# Altium PCB Second_plate_STM32.PcbDoc
Units mm, origin at the board's own origin, x right, y up, seen from the top; angles counter-clockwise.
Board outline 73.75 x 29.75 mm, 2 copper layers (Top Layer, Bottom Layer); 24 components, 27 nets, 149 pads, 57 vias.
Unrouted connection lines stored in the file: 1.
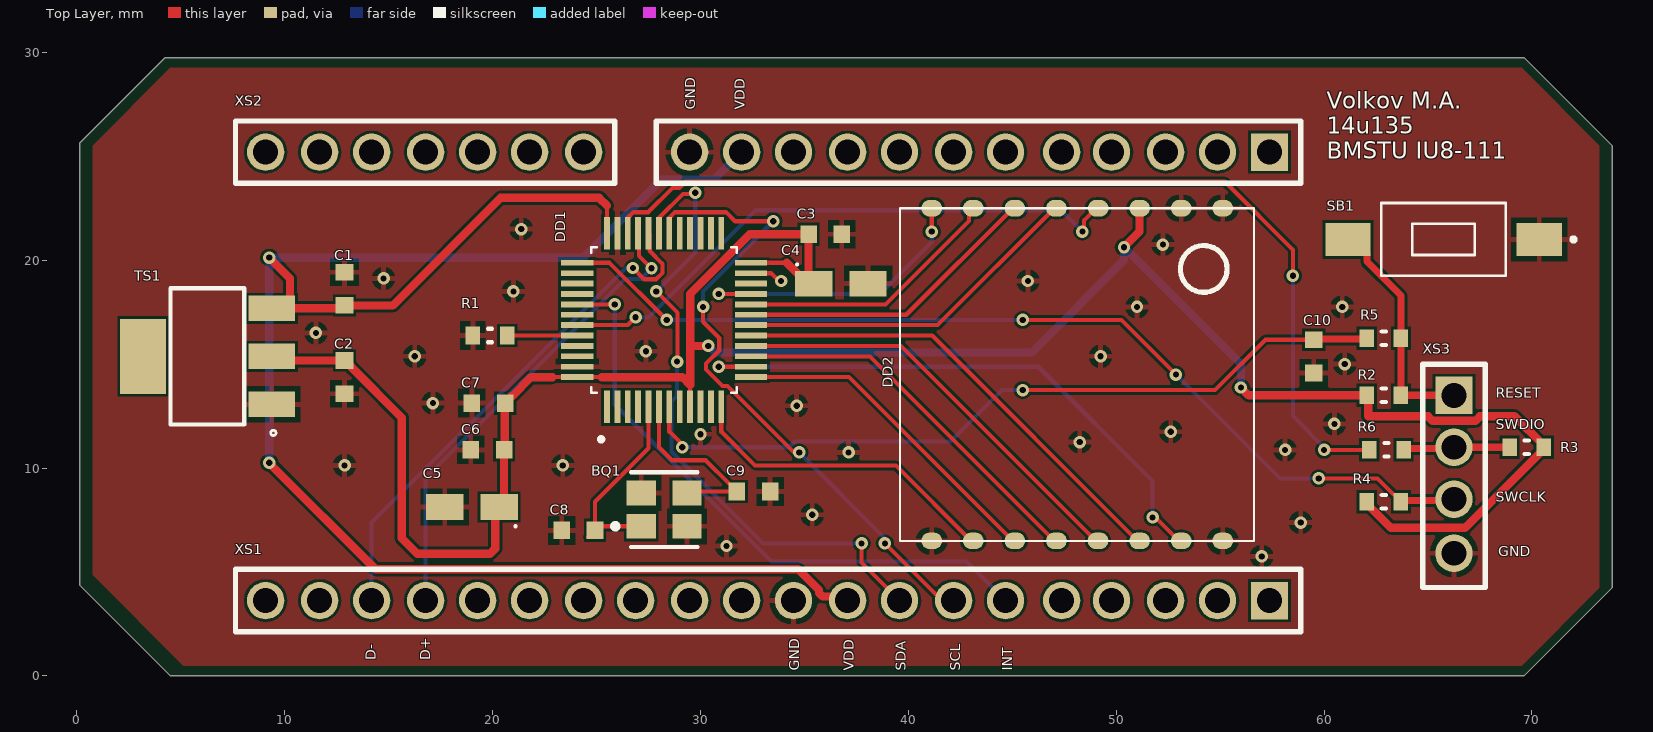
[diagram p0: Top Layer view]
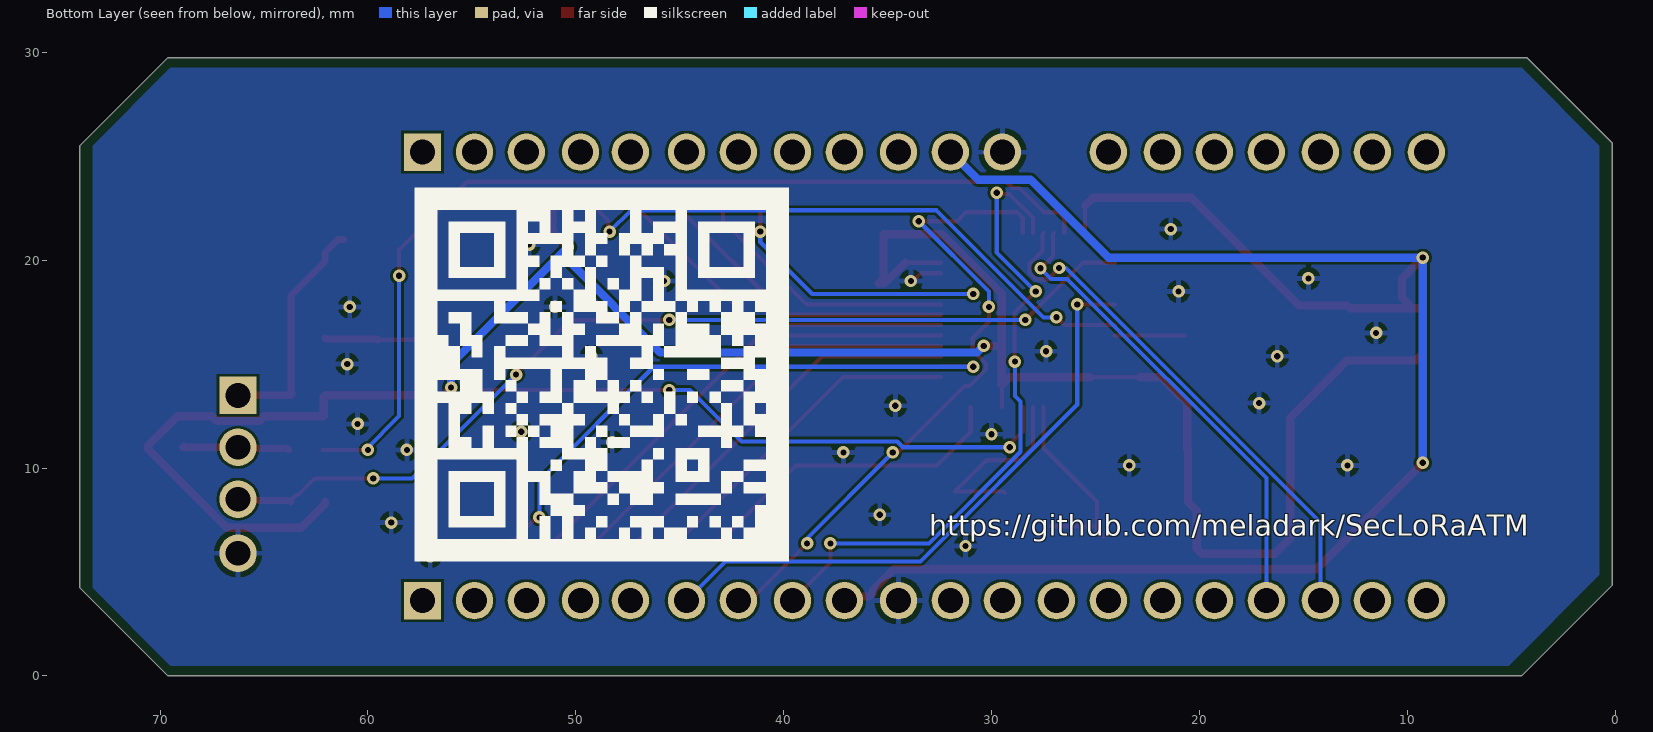
[diagram p1: Bottom Layer view, seen from below]

## Layer stack, top to bottom
Top Solder: solder mask 0.0102, Solder Resist, Dk 3.5
Top Layer: signal copper 0.0356
Dielectric 1: dielectric 0.32, FR-4, Dk 4.8
Bottom Layer: signal copper 0.0356
Bottom Solder: solder mask 0.0102, Solder Resist, Dk 3.5

## Board outline
0.125,4.375 0.125,25.625 4.25,29.75 69.625,29.75 73.875,25.5 73.875,4.25 69.625,0 4.5,0

## Design rules (kind name [scope] priority, off if disabled: settings)
Clearance [All] p1: gap=0.125 ignorepadtopadclearanceinfootprint=FALSE except(0.2: Arc-Hole Track-Hole SMDPad-Hole THPad-Hole Via-Hole Fill-Hole Poly-Hole Region-Hole Text-Hole)
PolygonConnect [All] p1: connectstyle=Relief reliefconductorwidth=0.254 reliefentries=4 polygonreliefangle="90 Angle" airgapwidth=0.254
RoutingVias [All] p1: holewidth=0.3 width=0.6 viastyle="Through Hole" minholewidth=0.3 minwidth=0.6 maxholewidth=0.4 maxwidth=0.8
SolderMaskExpansion [All] p1: expansion=0.102
Width [All] p1: maxlimit=0.6 minlimit=0.125 preferedwidth=0.25
30 further rules are at their usual default settings.

## Components (designator, comment, footprint, x,y, rotation, side; value= is the part's Value field where it differs from the comment)
BQ1 "NX3225GA" NDK_NX3225GA_0 28.25,8 r0 top
C1 "*" CAPC1608X09L 12.875,18.625 r90 top
C2 "*" CAPC1608X09L 12.875,14.375 r90 top
C3 "*" CAPC1608X09L 36,21.25 r0 top
C4 "*" CAPMP3216X16N-A 36.75,18.875 r0 top
C5 "*" CAPMP3216X16N-A 19,8.125 r180 top
C6 "GRM188R72A104KA35D" CAPC1608X09L 19.75,10.875 r180 top
C7 "*" CAPC1608X09L 19.8,13.125 r180 top
C8 "*" CAPC1608X09L 24.125,7 r0 top
C9 "*" CAPC1608X09L 32.55,8.875 r180 top
C10 "*" CAPC1608X09L 59.5,15.375 r270 top
DD1 "STM32L073CZT6" *QFP50P900X900X160-48N 28.25,17.125 r90 top
DD2 "RA-02 SX1278" RA-02 56.625,22.5 r270 top
R1 "R1608" RESC1608X05N 19.875,16.375 r0 top value=22
R2 "R1608" RESC1608X05N 62.875,13.5 r0 top value=10k
R3 "R1608" RESC1608X05N 69.75,11 r180 top value=10k
R4 "R1608" RESC1608X05N 62.875,8.375 r0 top value=10k
R5 "R1608" RESC1608X05N 62.875,16.25 r0 top value=22
R6 "R1608" RESC1608X05N 63,10.875 r0 top value=22
SB1 "1437566-3 (FSMSM)" *SW_1437566-4 65.75,21 r180 top
TS1 "LD1117S33CTR" *SOT223 6.276,15.375 r180 top
XS1 "PBS-20" PBS-20 57.375,3.625 r180 top
XS2 "PBS-20" "PBS-20 - 13" 57.375,25.199 r180 top
XS3 "PBS-4" PBS-4 66.25,13.5 r270 top

## Footprints (in the part's own frame and the unit in brackets; to place one, negate y for a bottom-side part, rotate by r counter-clockwise, add the part's x,y. Pads: shape width x height; smd on the part's side, far side on the other; paste and mask are expansions set on the pad)
*QFP50P900X900X160-48N [mm]
  rect 1.56x0.28 smd: 1(-4.18,2.75) 2(-4.18,2.25) 3(-4.18,1.75) 4(-4.18,1.25) 5(-4.18,0.75) 6(-4.18,0.25) 7(-4.18,-0.25) 8(-4.18,-0.75) 9(-4.18,-1.25) 10(-4.18,-1.75) 11(-4.18,-2.25) 12(-4.18,-2.75) 25(4.18,-2.75) 26(4.18,-2.25) 27(4.18,-1.75) 28(4.18,-1.25) 29(4.18,-0.75) 30(4.18,-0.25) 31(4.18,0.25) 32(4.18,0.75) 33(4.18,1.25) 34(4.18,1.75) 35(4.18,2.25) 36(4.18,2.75)
  rect 0.28x1.56 smd: 13(-2.75,-4.18) 14(-2.25,-4.18) 15(-1.75,-4.18) 16(-1.25,-4.18) 17(-0.75,-4.18) 18(-0.25,-4.18) 19(0.25,-4.18) 20(0.75,-4.18) 21(1.25,-4.18) 22(1.75,-4.18) 23(2.25,-4.18) 24(2.75,-4.18) 37(2.75,4.18) 38(2.25,4.18) 39(1.75,4.18) 40(1.25,4.18) 41(0.75,4.18) 42(0.25,4.18) 43(-0.25,4.18) 44(-0.75,4.18) 45(-1.25,4.18) 46(-1.75,4.18) 47(-2.25,4.18) 48(-2.75,4.18)
  silkscreen extent -5.84,-3.5 3.5,3.5, body extent -4.5,-4.5 4.5,4.5, height 1.6
*SOT223 [mil]
  rect 88x48 smd: 1(-122,91) 2(-122,0) 3(-122,-91)
  rect 86.61x141.73 smd: 4(122.01,0)
  silkscreen extent -130,-129 70,150, body extent -138,-128 138,128, height 67
*SW_1437566-4 [mm]
  rect 2.18x1.6 smd: 1(-4.6,0) 2(4.6,0)
  silkscreen extent -6.35,-1.75 3,1.75, body extent -4.98,-1.75 4.98,1.75, height 4.4
CAPC1608X09L [mm] "Chip Capacitor, 2-Leads, Body 1.60x0.80mm, IPC High Density"
  rect 0.8x0.85 smd paste-0.05 mask+0.07: 1(-0.8,0) 2(0.8,0)
  body extent -0.8,-0.4 0.8,0.4, height 0.9
CAPMP3216X16N-A [mm] "Molded Capacitor, 2-Leads, Body 3.20x1.60mm, IPC Medium Density"
  rect 1.8x1.23 smd: 1(-1.31,0) 2(1.31,0)
  silkscreen extent -2.15,0.88 -2.05,0.97, body extent -1.92,-0.9 1.92,0.9, height 1.6
NDK_NX3225GA_0 [mm]
  rect 1.4x1.2 smd paste+0 mask+0: 1(-1.1,-0.8) 2(1.1,-0.8) 3(1.1,0.8) 4(-1.1,0.8)
  silkscreen extent -2.47,-1.8 1.6,1.8, body extent -1.6,-1.25 1.6,1.25, height 0.6
PBS-4 [mm]
  rect 1.8x1.8 hole 1.2: 1(0,0)
  round 1.8 hole 1.2: 2(2.5,0) 3(5,0) 4(7.6,0)
  silkscreen extent -1.5,-1.5 9.25,1.5, body extent -1.25,-1.27 8.91,1.27, height 8.6
PBS-20 [mm]
  rect 1.8x1.8 hole 1.2: 1(0,0)
  round 1.8 hole 1.2: 2(2.5,0) 3(5,0) 4(7.6,0) 5(10,0) 6(12.7,0) 7(15.2,0) 8(17.8,0) 9(20.3,0) 10(22.9,0) 11(25.4,0) 12(27.9,0) 13(30.5,0) 14(33,0) 15(35.6,0) 16(38.1,0) 17(40.6,0) 18(43.2,0) 19(45.7,0) 20(48.3,0)
  silkscreen extent -1.5,-1.5 49.75,1.5, body extent -1.27,-1.27 49.53,1.27, height 8.4
"PBS-20 - 13" [mm]
  rect 1.8x1.8 hole 1.2: 1(0,0)
  round 1.8 hole 1.2: 2(2.5,0) 3(5,0) 4(7.6,0) 5(10,0) 6(12.7,0) 7(15.2,0) 8(17.8,0) 9(20.3,0) 10(22.9,0) 11(25.4,0) 12(27.9,0) 14(33,0) 15(35.6,0) 16(38.1,0) 17(40.6,0) 18(43.2,0) 19(45.7,0) 20(48.3,0)
  silkscreen extent -1.5,-1.5 49.75,1.5, body extent -1.27,-1.27 49.53,1.27, height 8.4
RA-02 [mm]
  oval 0.8x1 smd: 1(0,-1.5) 2(0,-3.5) 3(0,-5.5) 4(0,-7.493) 5(0,-9.5) 6(0,-11.5) 7(0,-13.5) 8(0,-15.5) 9(16,-15.5) 10(16,-13.5) 11(16,-11.5) 12(16,-9.5) 13(16,-7.5) 14(16,-5.5) 15(16,-3.5) 16(16,-1.5)
  silkscreen extent 0,-17.02 16,0, body extent 0,-17.01 16,-0.01, height 3.2
RESC1608X05N [mm] "Chip Resistor, 2-Leads, Body 1.60x0.80mm, IPC Medium Density"
  rect 0.7x0.85 smd paste-0.05: 1(-0.825,0) 2(0.825,0)
  silkscreen extent -0.1,-0.33 0.1,0.33, body extent -0.8,-0.4 0.8,0.4, height 0.45

## Part data
BQ1: library part NX3225GA-25MHZ, "NX3225GA-25MHZ 8pF, 25 МГц, 30/20ppm, 8пФ, -40...+85°C, SMD 3.2*2.5*0.75мм, Кварцевый резонатор", Package="SMD-4 NDK America, Inc.", Availability=Unavailable, ComponentLink1Description=buy, ComponentLink1URL=https://www.chipdip.ru/product0/9000523947, ComponentLink2Description=datasheet, ComponentLink2URL=https://static.chipdip.ru/lib/014/DOC004014815.pdf, MF="NDK America, Inc.", MP="NX3225GA-25MHZ 8pF", Price=None, SnapEDA_Link=https://www.snapeda.com/parts/NX2520SA-24.000000MHZ-B8/NDK%20America%2C%20Inc./view-part/?ref=snap
C1 C2 C3 C6 C7 C8 C9 C10: library part CC1608, "Конденсатор 1.6x0.8 мм", Tolerance=±10%, РКД Наименование="CC1608M - NP0 - 16 V - 10 nF ±10%", ТКЕ=X7R
  C1: GRM21BR71C105KA01L=100n
  C2: GRM21BR71C105KA01L=10u
  C3 C6 C7 C10: GRM188R71H104K=100nF
  C8: GRM1885C1H240J=24pF
  C9: GRM1887U1H472JA01D=24pF
C4 C5: library part CT3216-A, "Tantalum Surface Mount Capacitor, Size A", Voltage=6.3V
  C4: TECAP1/16VA10=1uF
  C5: TECAP10/10VA10=10uF
DD1: "ARM® Cortex®-M0+ STM32 L0 Microcontroller IC 32-Bit 32MHz 192KB _192K x 8_ FLASH 48-LQFP", Package="LQFP-48 STMicroelectronics", Digi-Key_Part_Number=497-17506-ND, Digi-Key_Purchase_URL=https://www.digikey.com/product-detail/en/stmicroelectronics/STM32L073CZT6/497-17506-ND/8024098?utm_source=snapeda&utm_medium=aggregator&utm_campaign=symbol, MF=STMicroelectronics, MP=STM32L073CZT6, SnapEDA_Link=https://www.snapeda.com/parts/STM32L073CZT6/STMicroelectronics/view-part/?ref=snap
DD2: library part RA-02
R1 R2 R3 R4 R5 R6: "Резистор 1.6x0.8 мм", Tolerance=±1%, РКД Наименование="RC1608M - 22 Ohm ±1%"
SB1: library part FSMSM, "1437566-3 (FSMSM), Кнопка тактовая h=4.6 мм SMD SPST Switch Tactile / Switch Tactile OFF (ON) SPST Rectangular Button Gull Wing 0.05A 24VDC SMD Loose", ComponentLink1Description=buy, ComponentLink1URL=https://www.chipdip.ru/product/tyco-1437566-3-fsmsm, ComponentLink2Description=datasheet, ComponentLink2URL=https://static.chipdip.ru/lib/071/DOC000071159.pdf, Артикул="1437566-3 (FSMSM)", Произвдитель="TE Connectivity"
TS1: "Linear Regulator / LDO Regulator Pos 3.3V 1.3A 4-Pin(3+Tab) SOT-223 T/R", Code_IPC=SOT-223, ComponentLink1Description=buy, ComponentLink1URL=https://www.chipdip.ru/product/ld1117s33ctr-2, ComponentLink2Description=datasheet, ComponentLink2URL=https://static.chipdip.ru/lib/292/DOC000292513.pdf, DatasheetVersion="revB, Feb-2007", PackageDescription="3-Lead Plastic Small Outline Transistor (TT) [SOT-23]", PackageReference=SOT-223, PackageVersion="revBB, Aug-2009", PartNumber=LD1117S33CTR
XS1: library part PBS_20_2
XS2: library part PBS-20_1, ComponentLink1Description=datasheet, ComponentLink1URL=https://static.chipdip.ru/lib/226/DOC000226931.pdf, ComponentLink2Description=buy, ComponentLink2URL=https://www.chipdip.ru/catalog-show/pin-connectors-and-sockets?x.698=ZGQ&gq=PBS
XS3: library part "отладка swd", "2.54mm swdio", ComponentLink1Description=3d, ComponentLink1URL=https://www.3dcontentcentral.com/secure/download-model.aspx?catalogid=171&id=455493, ComponentLink2Description=https://www.chipdip.ru/product/pld-6, ComponentLink2URL=https://www.chipdip.ru/product/pld-6

## Via types
v1: diameter 0.6, hole 0.3, Top Layer to Bottom Layer, 57 vias

## Nets (pads, with @x,y where several pads share a name; then routed paths per layer and width w, separated by ;. In a path a pad name is that pad's centre, name@x,y a point inside that pad or via, vN(x,y) a via of type N, cw(c..) or ccw(c..) an arc to the next point about the centre after c; other vN are vias at no path point)
BOOT0: DD1.44 R1.2 | length 3.4
  Top Layer w0.2: R1.2 DD1.44
DM: DD1.32 XS1.18 | length 25.4
  Top Layer w0.2: v1(26.75,19.625) 27.291,19.084 27.86,19.084 28.167,19.391 28.167,19.826 27.54,20.453 27.54,21.265 DD1.32
  Bottom Layer w0.2: XS1.18 14.175,7.377 26.423,19.625 v1(26.75,19.625)
DP: DD1.33 XS1.17 | length 22.9
  Top Layer w0.2: DD1.33 27.04,21.265 27.04,20.211 v1(27.642,19.609)
  Bottom Layer w0.2: XS1.17 16.775,9.517 26.358,19.1 27.133,19.1 v1(27.642,19.609)
GND: BQ1.2 BQ1.4 C1.2 C2.1 C3.2 C4.2 C5.2 C6.2 C7.2 C8.1 C9.1 C10.2 DD1.8 DD1.23 DD1.35 DD1.47 DD2.1 DD2.2 DD2.9 DD2.16 R1.1 SB1.1 TS1.1 XS1.10 XS2.12 XS3.4 | length 1.6
  Top Layer w0.2: DD1.23 33.392,19.375 33.767,19 v1(33.875,19)
  other v1: 57,5.75 31.25,6.25 58.875,7.375 35.375,7.75 12.875,10.125 23.375,10.125 37.125,10.75 58.125,10.875 48.25,11.25 30,11.625 52.625,11.75 60.5,12.125 34.625,13 17.125,13.125 61,15 16.25,15.375 49.25,15.375 27.375,15.625 11.5,16.5 51,17.75 60.875,17.75 21,18.5 45.75,19 14.75,19.125 52.25,20.75 21.375,21.5
INT: DD1.41 XS1.6 | length 29.3
  Top Layer w0.2: DD1.41 v1(25.875,17.875)
  Bottom Layer w0.2: v1(25.875,17.875) 25.875,13.048 33.423,5.5 42.8,5.5 XS1.6
MISO: DD1.16 DD2.13 | length 20.6
  Top Layer w0.2: DD1.16 39.65,15.875 49.025,6.5 DD2.13
MOSI: DD1.17 DD2.14 | length 22.8
  Top Layer w0.2: DD1.17 41.15,16.375 51.025,6.5 DD2.14
NetBQ1_1: BQ1.1 C8.2 DD1.5 | length 9.5
  Top Layer w0.2: C8.2@24.6,6.675 24.625,6.675 24.925,6.975 C8.2 24.925,8.377 27.5,10.952 DD1.5 ; C8.2@25.125,7.2 BQ1.1
NetBQ1_3: BQ1.3 C9.2 DD1.6 | length 9
  Top Layer w0.2: DD1.6 28,11 28.625,10.375 30.25,10.375 31.425,9.2 31.45,9.2 31.75,8.9 C9.2 29.425,8.875 BQ1.3
NetC10_1: C10.1 DD1.7 R5.1 | length 37.3
  Top Layer w0.2: DD1.7 28.5,11.75 29.125,11.125 v1(29.125,11) ; v1(45.5,13.75) 54.75,13.75 57.175,16.175 C10.1
  Top Layer w0.35: C10.1 59.537,16.212 62.012,16.212 R5.1
  Bottom Layer w0.2: v1(29.125,11) 34.258,11 34.533,11.275 42.025,11.275 44.5,13.75 v1(45.5,13.75)
NetDD1_18: DD1.18 DD2.5 | length 17
  Top Layer w0.2: DD1.18 41.4,16.875 47.025,22.5 DD2.5
NetDD1_19: DD1.19 DD2.6 | length 14.8
  Top Layer w0.2: DD1.19 39.9,17.375 45.025,22.5 DD2.6
NetDD1_20: DD1.20 DD2.7 | length 12.8
  Top Layer w0.2: DD1.20 38.893,17.875 42.91,21.892 42.91,22.285 DD2.7
NetDD1_21: DD1.21 DD2.8 | length 14.5
  Top Layer w0.2: v1(30.875,18.375) DD1.21 ; v1(41.125,21.375) DD2.8
  Bottom Layer w0.2: v1(30.875,18.375) 38.625,18.375 41.125,20.875 v1(41.125,21.375)
NetDD1_34: DD1.34 R6.1 | length 47.3
  Top Layer w0.2: DD1.34 26.5,22.043 26.767,22.31 27.484,22.31 28.654,23.48 28.977,23.48 29.272,23.775 55.225,23.775 58.5,20.5 v1(58.5,19.25) ; v1(60,10.875) R6.1
  Bottom Layer w0.2: v1(58.5,19.25) 58.5,12.5 v1@60.125,10.875
NetDD1_43: DD1.43 DD2.4 | length 28.5
  Top Layer w0.2: DD1.43 26.5,16.875 v1(26.875,17.25) ; v1(48.375,21.375) 48.452,21.452 48.452,21.92 49.032,22.5 DD2.4
  Bottom Layer w0.2: v1(26.875,17.25) 27.5,17.25 32.65,22.4 47.35,22.4 v1(48.375,21.375)
NSS: DD1.14 DD2.15 | length 28.3
  Top Layer w0.2: v1(30.875,14.875) DD1.14 ; v1(51.75,7.625) 51.9,7.625 53.025,6.5 DD2.15
  Bottom Layer w0.2: v1(30.875,14.875) 46.25,14.875 51.75,9.375 v1(51.75,7.625)
PA2: DD1.12 DD2.10 | length 15.5
  Top Layer w0.2: DD1.12 31,11.75 32.625,10.125 39.4,10.125 43.025,6.5 DD2.10
PA3: DD1.13 DD2.11 | length 16
  Top Layer w0.2: DD1.13 37.15,14.375 45.025,6.5 DD2.11
RESET: R2.2 R5.2 SB1.2 XS3.1 | length 11.3
  Top Layer w0.35: SB1.2 61.44,21 62.065,20.375 62.065,19.935 63.7,18.3 R5.2 63.7,13.625 63.637,13.563 R2.2 XS3.1
SCK: DD1.15 DD2.12 | length 18.4
  Top Layer w0.2: DD1.15 38.15,15.375 47.025,6.5 DD2.12
SCL: DD1.30 XS1.7 | length 31.9
  Top Layer w0.2: DD1.30 28.5,22.043 28.767,22.31 31.233,22.31 31.668,21.875 v1(33.5,21.875) ; v1(30.125,17.75) 30.125,17.037 30.9,16.262 30.9,15.658 30.267,15.024 30.267,14.741 31.058,13.95 31.3,13.95 34.5,10.75 v1(34.75,10.75) ; v1(38.875,6.375) 41.625,3.625 XS1.7
  Bottom Layer w0.2: v1(30.125,17.75) 30.125,18.5 v1(33.5,21.875) ; v1(34.75,10.75) 39,6.5 v1@39,6.375
SDA: DD1.31 XS1.8 | length 31.3
  Top Layer w0.2: v1(27.875,18.5) 28.9,17.475 28.9,15.15 v1(28.875,15.125) ; DD1.31 28,22.043 29.15,23.193 29.693,23.193 v1(29.75,23.25) ; v1(37.75,6.375) 37.75,5.45 XS1.8
  Bottom Layer w0.2: v1(27.875,18.5) 29.75,20.375 v1(29.75,23.25) ; v1(28.875,15.125) 28.875,13.475 28.6,13.2 28.6,10.783 33.008,6.375 v1(37.75,6.375)
SWCLK: DD1.37 R4.2 XS3.3 | length 47
  Top Layer w0.2: DD1.37 25.625,19.875 v1(28.375,17.125) ; v1(45.5,17.125) 50.25,17.125 v1(52.875,14.5) ; v1(59.75,9.5) 62.575,9.5 63.375,8.7 63.45,8.7 63.7,8.45 R4.2
  Top Layer w0.35: R4.2 63.762,8.437 66.187,8.437 XS3.3
  Bottom Layer w0.2: v1(28.375,17.125) v1(45.5,17.125) ; v1(52.875,14.5) 57.875,9.5 v1(59.75,9.5)
SWDIO: R3.2 R6.2 XS3.2 | length 5.2
  Top Layer w0.35: R6.2 63.887,10.937 66.187,10.937 XS3.2 68.8,11 68.862,11.063 R3.2
VDD: C2.2 C3.1 C4.1 C5.1 C6.1 C7.1 DD1.9 DD1.24 DD1.48 DD2.3 R2.1 R3.1 R4.1 TS1.2 | length 115.3
  Top Layer w0.2: 22.875,14.375 DD1.48 25.25,14.375 ; DD1.9 29.5,14 ; DD1.24 34.155,19.875
  Top Layer w0.4: TS1.2 9.575,15.175 C2.2 12.9,15.175 13.2,14.875 13.2,14.85 15.625,12.425 15.625,6.625 16.375,5.875 19.875,5.875 20.125,6.125 20.125,7.94 C5.1 20.55,8.365 C6.1 20.575,10.9 20.575,13.1 C7.1 20.6,13.15 20.9,13.45 20.925,13.45 21.85,14.375 22.875,14.375 ; 25.25,14.375 29.125,14.375 29.5,14 29.5,15.75 ; v1(30.375,15.875) 29.625,15.875 29.5,15.75 ; 34.155,19.875 35.155,18.875 C4.1 35.2,19.115 C3.1 32.375,21.25 29.5,18.375 29.5,15.75 ; v1(50.375,20.625) 51.125,21.375 DD2.3 ; v1(56,13.875) 56.375,13.5 R2.1 62.125,13.425 62.125,12.5 65.025,12.5 65.025,12.465 65.215,12.275 67.285,12.275 67.475,12.465 67.475,12.5 69.15,12.5 70.575,11.075 R3.1 70.575,10.925 66.775,7.125 63.225,7.125 62.05,8.3 R4.1
  Bottom Layer w0.4: v1(30.375,15.875) 30.687,15.563 45.938,15.563 50.375,20 v1(50.375,20.625) 56,15 v1(56,13.875)
VDD_plate: C1.1 DD1.36 TS1.3 XS1.9 XS2.11 | length 88.2
  Top Layer w0.2: DD1.36 25.5,22.625
  Top Layer w0.4: v1(9.25,10.25) 14.375,5.125 34.707,5.125 35.7,4.132 35.7,3.991 35.875,3.816 36.884,3.816 XS1.9 ; v1(9.25,20.125) 10.25,19.125 10.25,18.196 TS1.3@9.74,17.686 ; TS1.3 TS1.3@9.74,17.686 ; 25.5,22.625 25.125,23 20.375,23 15.2,17.825 C1.1 12.736,17.686 TS1.3@9.74,17.686
  Bottom Layer w0.4: v1(9.25,10.25) v1(9.25,20.125) 24.375,20.125 28.125,23.875 30.651,23.875 XS2.11
pads on no net: DD1.1 DD1.2 DD1.3 DD1.4 DD1.10 DD1.11 DD1.22 DD1.25 DD1.26 DD1.27 DD1.28 DD1.29 DD1.38 DD1.39 DD1.40 DD1.42 DD1.45 DD1.46 TS1.4 XS1.1 XS1.2 XS1.3 XS1.4 XS1.5 XS1.11 XS1.12 XS1.13 XS1.14 XS1.15 XS1.16 XS1.19 XS1.20 XS2.1 XS2.2 XS2.3 XS2.4 XS2.5 XS2.6 XS2.7 XS2.8 XS2.9 XS2.10 XS2.14 XS2.15 XS2.16 XS2.17 XS2.18 XS2.19 XS2.20

## Polygon pours and split planes (outlines as drawn)
no net on Mechanical 1 "GND" (solid): 1.375,1.125
GND on Bottom Layer "GND" (solid, pour order 14): 5.125,0.5 0.75,4.875 0.75,25.5 4.5,29.25 69.5,29.25 73.25,25.5 73.25,4.25 69.5,0.5
no net on Bottom Layer "GND" (solid, pour order 8): 5.125,0.5
GND on Top Layer "GND" (solid, pour order 12): 5.125,0.5 0.75,4.875 0.75,25.5 4.5,29.25 69.5,29.25 73.25,25.5 73.25,4.25 69.5,0.5

## Silkscreen, mask and mechanical layers (free items; w line width, h text height)
Top Overlay:
  text "GND" at 29.75,27.25 h0.5 r90
  text "VDD" at 32.125,27.25 h0.5 r90
  text "Volkov M.A.  / 14u135 / BMSTU IU8-111" at 60.125,24.875 h0.8
  text "RESET" at 68.25,13.375 h0.5
  text "SWDIO" at 68.25,11.875 h0.5
  text "SWCLK" at 68.25,8.375 h0.5
  text "GND" at 68.375,5.75 h0.5
  text "D-" at 14.375,0.75 h0.5 r90
  text "D+" at 17,0.75 h0.5 r90
  text "GND" at 34.75,0.25 h0.5 r90
  text "VDD" at 37.375,0.25 h0.5 r90
  text "SDA" at 39.875,0.25 h0.5 r90
  text "SCL" at 42.5,0.25 h0.5 r90
  text "INT" at 45,0.25 h0.5 r90
Bottom Overlay:
  drawing of 255 lines, arcs and shapes, not listed
  text "https://github.com/meladark/SecLoRaATM" at 33,6.75 h1
Mechanical 13:
  the board outline again, w0.254